# EAGLE board Emergency Light with Battery Charger (EAGLE 6.5.0)
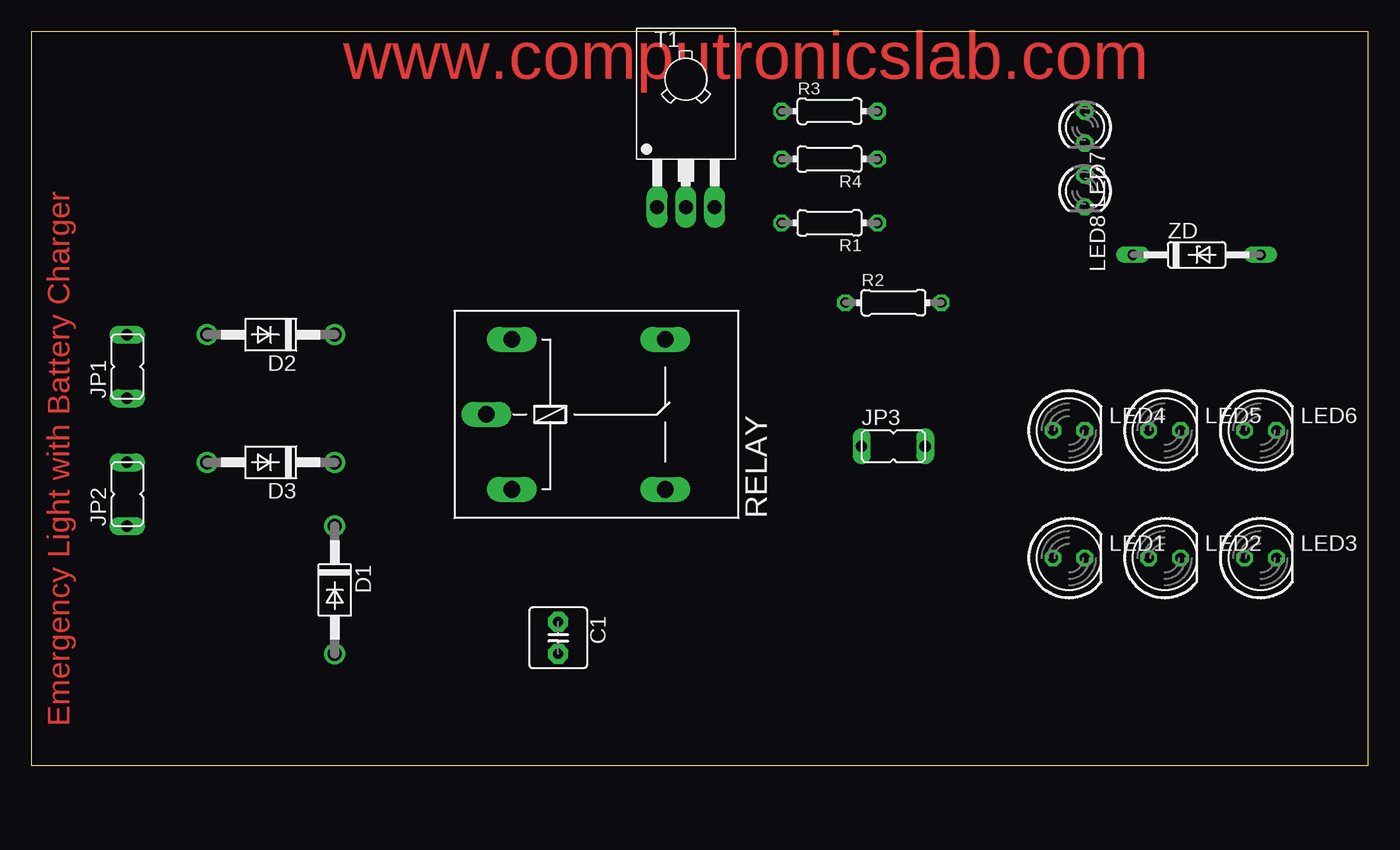
[diagram p0: board, top side]
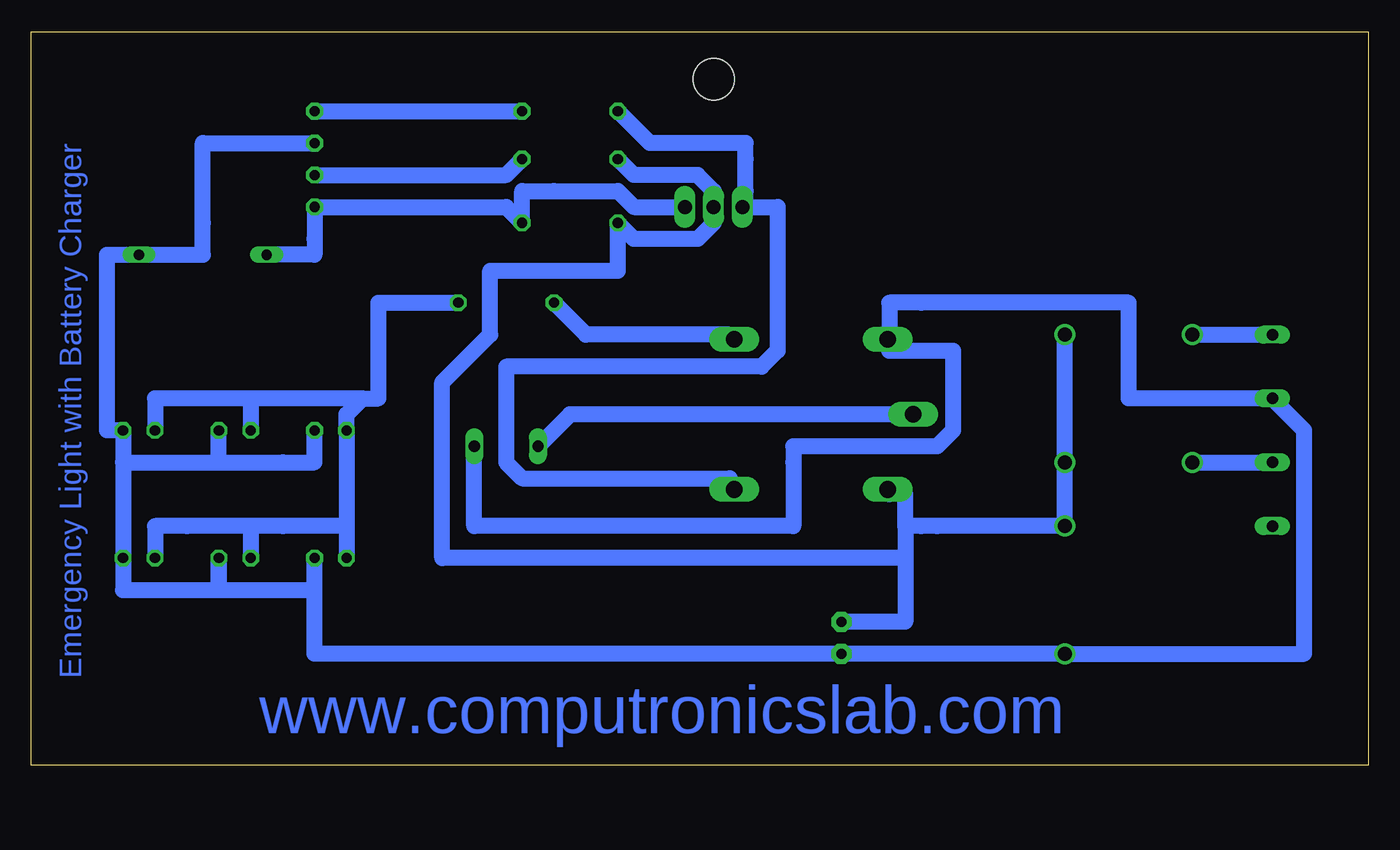
[diagram p1: board, bottom side, seen from below]

Size 106.35 x 58.41 mm. Coordinates in mm from the lower left corner, seen from the top.
Outline: 0,0 106.35,0 106.35,58.41 0,58.41 0,0
Copper layers (1*16): Top 0.035mm / dielectric 1.5mm / Bottom 0.035mm
Design rules "default *": minimum track width 50mil, minimum drill 24mil, track to track 8mil, track to pad 8mil, pad to pad 8mil, via to via 8mil, smd to smd 8mil, copper to edge 40mil, drill to drill 8mil, minimum pad ring 10mil, minimum via ring 8mil, stop-mask expansion 4mil, vias tented up to drill 0mil, thermal gap 10mil

## Footprints (pad centres in the part's own frame; a part is rotated, then mirrored left to right if it is on the bottom)
C2.5-5 = drill 0.813 pad 1.6 octagon: 1 -1.27,0; 2 1.27,0
DO41-10 = drill 1.118: A 5.08,0; C -5.08,0
JP1 = drill 0.914 long: 1 0,-2.54; 2 0,2.54
LED5MM = drill 0.813 octagon: A -1.27,0; K 1.27,0
LED3MM = drill 0.813 octagon: A -1.27,0; K 1.27,0
0204/7 = drill 0.813 octagon: 1 -3.81,0; 2 3.81,0
G5LE = drill 1.321 long: 1 -7.493,-5.969; 2 -7.493,5.969; O 4.699,5.969; P -9.525,0; S 4.699,-5.969
TO126 = drill 1.118 long: 1 -2.286,-5.08; 2 0,-5.08; 3 2.286,-5.08 | hole 3.302: 0,5.08
DO35Z10 = drill 0.813 long: A 5.08,0; C -5.08,0

## Placement (x,y rotation side)
C1  100uf  [C2.5-5]  41.91,10.16 270 top
D1  1N4007  [DO41-10]  24.13,13.97 270 top
D2  1N4007  [DO41-10]  19.05,34.29 180 top
D3  1N4007  [DO41-10]  19.05,24.13 180 top
JP1  ac connector  [JP1]  7.62,31.75 0 top
JP2  ac connector  [JP1]  7.62,21.59 0 top
JP3  battery  [JP1]  68.58,25.4 270 top
LED1  5mm  [LED5MM]  82.55,16.51 0 top
LED2  5mm  [LED5MM]  90.17,16.51 0 top
LED3  5mm  [LED5MM]  97.79,16.51 0 top
LED4  5mm  [LED5MM]  82.55,26.67 0 top
LED5  5mm  [LED5MM]  90.17,26.67 0 top
LED6  5mm  [LED5MM]  97.79,26.67 0 top
LED7  3mm  [LED3MM]  83.82,50.8 270 top
LED8  3mm  [LED3MM]  83.82,45.72 270 top
R1  100E  [0204/7]  63.5,43.18 180 top
R2  47E  [0204/7]  68.58,36.83 0 top
R3  330E  [0204/7]  63.5,52.07 0 top
R4  330E  [0204/7]  63.5,48.26 180 top
RELAY  6V  [G5LE]  45.72,27.94 0 top
T1  BD139  [TO126]  52.07,49.53 0 top
ZD  6.8 V  [DO35Z10]  92.71,40.64 0 top

## Library data of the parts
C1 = capacitor-wima
D1-D3 ZD = diode
JP1-JP3 = jumper
LED1-LED8 = led
R1-R4 = rcl
RELAY = relay; OC_FARNELL: unknown; OC_NEWARK: unknown
T1 = transistor

## Nets
N$1: D2.A JP1.2
N$2: D3.A JP2.2
N$3: LED7.A R3.2
N$4: C1.2 D1.A JP1.1 JP3.2 LED1.K LED2.K LED3.K LED4.K LED5.K LED6.K LED7.K RELAY.2 ZD.A
N$5: LED8.K R1.1 T1.3 ZD.C
N$6: R3.1 RELAY.S T1.1
N$7: JP3.1 RELAY.P
N$8: R2.1 RELAY.O
N$9: LED1.A LED2.A LED3.A LED4.A LED5.A LED6.A R2.2
N$10: C1.1 D1.C D2.C D3.C R1.2 R4.2 RELAY.1 T1.2
N$11: LED8.A R4.1

## Tracks (layer width: path | path; a pad name or v marks a point on that pad's centre or on a via)
N$1
  Bottom 1.27: D2.A JP1.2
N$2
  Bottom 1.27: D3.A JP2.2
N$3
  Bottom 1.27: LED7.A R3.2
N$4
  Bottom 1.27: JP3.2 71.12,19.05 45.72,19.05 45.72,24.13 45.72,25.4 39.37,25.4 34.29,25.4 33.02,26.67 33.02,33.02 38.1,33.02 RELAY.2 38.1,34.29 38.1,36.83 35.56,36.83 19.05,36.83 19.05,29.21 11.43,29.21 JP1.1 5.08,26.67 5.08,8.89 D1.A C1.2 76.2,8.89 83.82,8.89 LED1.K 83.82,15.24 83.82,13.97 86.36,13.97 88.9,13.97 91.44,13.97 | LED7.K 92.71,49.53 92.71,43.18 92.71,40.64 ZD.A 100.33,40.64 100.33,27.94 100.33,26.67 LED6.K 99.06,24.13 | 91.44,13.97 LED2.K 91.44,13.97 | 99.06,24.13 LED3.K 99.06,13.97 96.52,13.97 93.98,13.97 91.44,13.97 | LED4.K 83.82,25.4 83.82,24.13 86.36,24.13 91.44,24.13 | 99.06,24.13 91.44,24.13 | 91.44,24.13 LED5.K
N$5
  Bottom 1.27: ZD.C 83.82,40.64 83.82,41.91 LED8.K 68.58,44.45 R1.1 67.31,45.72 64.77,45.72 59.69,45.72 58.42,44.45 54.61,44.45 T1.3
N$6
  Bottom 1.27: R3.1 57.15,49.53 53.34,49.53 49.53,49.53 49.53,48.26 49.53,45.72 49.53,44.45 | 49.53,44.45 T1.1 49.53,44.45 | 49.53,44.45 46.99,44.45 46.99,33.02 48.26,31.75 68.58,31.75 68.58,24.13 67.31,22.86 50.8,22.86 RELAY.S
N$7
  Bottom 1.27: JP3.1 63.5,27.94 36.83,27.94 RELAY.P
N$8
  Bottom 1.27: R2.1 62.23,34.29 50.8,34.29 RELAY.O
N$9
  Bottom 1.27: 81.28,19.05 LED4.A 81.28,27.94 80.01,29.21 | 81.28,19.05 LED1.A | 86.36,19.05 88.9,19.05 LED2.A | 81.28,19.05 86.36,19.05 | LED3.A 96.52,19.05 93.98,19.05 86.36,19.05 | 80.01,29.21 78.74,29.21 78.74,36.83 R2.2 | 86.36,29.21 88.9,29.21 LED5.A | 80.01,29.21 86.36,29.21 | LED6.A 96.52,29.21 93.98,29.21 86.36,29.21
N$10
  Bottom 1.27: R4.2 58.42,46.99 53.34,46.99 52.07,45.72 T1.2 52.07,43.18 53.34,41.91 58.42,41.91 R1.2 59.69,40.64 59.69,39.37 63.5,39.37 64.77,39.37 69.85,39.37 69.85,34.29 73.66,30.48 73.66,16.51 36.83,16.51 | 34.29,19.05 36.83,19.05 | 36.83,19.05 36.83,16.51 | 36.83,16.51 36.83,11.43 C1.1 | 34.29,19.05 D1.C D3.C D2.C | 36.83,19.05 35.56,19.05 34.29,19.05 | 36.83,19.05 36.83,21.59 38.1,21.59 RELAY.1
N$11
  Bottom 1.27: R4.1 68.58,46.99 LED8.A

## Text on the board
Top: www.computronicslab.com | Emergency Light with Battery Charger
Bottom: Emergency Light with Battery Charger | www.computronicslab.com